# EAGLE board SolarPoints (EAGLE 9.6.2)

Size 160 x 100 mm. Coordinates in mm from the lower left corner, seen from the top.
Outline: 0,0 160,0 160,100 0,100 0,0
Copper layers (1*16): Top 0.035mm / dielectric 1.5mm / Bottom 0.035mm
Design rules "default": minimum track width 6mil, minimum drill 0.35mm, track to track 6mil, track to pad 6mil, pad to pad 6mil, via to via 6mil, smd to smd 6mil, copper to edge 40mil, drill to drill 6mil, minimum pad ring 10mil, minimum via ring 8mil, stop-mask expansion 4mil, vias tented up to drill 0mil, thermal gap 10mil

## Footprints (pad centres in the part's own frame; a part is rotated, then mirrored left to right if it is on the bottom)
BATTERY-GENERIC = drill 1.118 pad 3.15 octagon: + 2.54,0; - -2.54,0
DO-41 = drill 1: A 4.325,0 | drill 1 square: C -4.325,0
LDH-5R = drill 0.813 long: 1 -1.27,-5.08; 2 1.27,-5.08 | hole 1.219: 2.54,0; -2.54,0
91A1A-B28-B15L-ND = drill 1: 1 2.54,0; 2 0,0; 3 -2.54,0
TO92-EBC = drill 0.813 long: B 0,-1.27; C -2.54,-1.27; E 2.54,-1.27
RESAD1016W63L850D250B = drill 0.83 pad 1.43: 1 -5.08,0; 2 5.08,0
REL-5PIN = drill 1.016 long: C 8.89,3.81; O 13.945,-3.81; S 3.734,-3.81; S1 -11.43,-3.81; S2 -11.43,3.835
HC-SR501 = drill 1.016 pad 1.88 octagon: GND 2.54,10.795; OUT 0,10.795 | drill 1.016 pad 1.88 square: VCC -2.54,10.795
TO254P1054X470X1955-3 = drill 1.24 pad 1.86 square: 1 -2.54,-0.51 | drill 1.24 pad 1.86: 2 0,-0.51; 3 2.54,-0.51
DO34Z7 = drill 0.813 long: A 3.81,0; C -3.81,0

## Placement (x,y rotation side)
BATTERY  12V  [BATTERY-GENERIC]  102.87,38.1 0 top
D1  1N4004  [DO-41]  24.13,53.34 180 top
D2  1N4004  [DO-41]  68.58,50.8 180 top
D4  1N4004  [DO-41]  102.87,50.8 0 top
LMP1  [LDH-5R]  124.46,80.01 0 top
POTENCIOMETRO  2k  [91A1A-B28-B15L-ND]  46.99,25.4 270 top
Q1  BC548  [TO92-EBC]  57.15,29.21 270 bottom
R1  180  [RESAD1016W63L850D250B]  58.42,45.72 90 top
R2  7  [RESAD1016W63L850D250B]  83.82,50.8 0 top
R3  1K  [RESAD1016W63L850D250B]  76.2,29.21 0 top
R4  220  [RESAD1016W63L850D250B]  125.73,62.23 270 top
REL1  [REL-5PIN]  102.87,71.12 90 top
SENSOR_PIR  HC-SR501  [HC-SR501]  67.31,73.66 270 top
VR1  LM317T  [TO254P1054X470X1955-3]  46.99,50.8 90 bottom
ZENER  14  [DO34Z7]  88.9,33.02 270 top

## Library data of the parts
BATTERY R1-R4 = Tinkercad
D1 D2 D4 = Diodes; CREATED_BY: PCBLayout.com; DIGIKEY_PART_NUMBER: 1N4004MSCT-ND; MANUFACTURER: Micro Commercial Co; MPN: 1N4004; PACKAGE: DO-41
LMP1 REL1 = special
POTENCIOMETRO = Potentiometer_Trimmers; CREATED_BY: PCBLayout.com; DIGIKEY_PARTNO: 91A1A-B28-B15L-ND; MANUFACTURER: Bourns Inc.; MPN: 91A1A-B28-B15L
Q1 = transistor-npn
SENSOR_PIR = Sensors_PIR_Lux
VR1 = LM317T; AVAILABILITY: In Stock; CHECK_PRICES: https://www.snapeda.com/parts/LM317T/Texas+Instruments/view-part/?ref=eda; DESCRIPTION: 1.5-A, 40-V, adjustable linear voltage regulator 3-TO-220; MF: Texas Instruments; MP: LM317T; PACKAGE: TO-220-3 Texas Instruments; PRICE: None; SNAPEDA_LINK: https://www.snapeda.com/parts/LM317T/Texas+Instruments/view-part/?ref=snap
ZENER = diode; SPICEPREFIX: B

## Nets
GND: BATTERY.- D4.A LMP1.1 POTENCIOMETRO.1 Q1.E REL1.C REL1.S REL1.S1 SENSOR_PIR.GND
N$1: BATTERY.+ D4.C R2.2 REL1.S2 ZENER.C
N$2: R3.2 ZENER.A
N$3: Q1.B R3.1
N$4: POTENCIOMETRO.2 POTENCIOMETRO.3 Q1.C R1.1 VR1.1
N$5: D2.A R1.2 VR1.2
N$6: D2.C R2.1
N$7: LMP1.2 R4.1
N$8: D1.A
N$9: D1.C VR1.3
N$10: R4.2 SENSOR_PIR.OUT
N$12: REL1.O SENSOR_PIR.VCC

## Tracks (layer width: path | path; a pad name or v marks a point on that pad's centre or on a via)
GND  (8 unrouted)
N$1  (4 unrouted)
N$2  (1 unrouted)
N$3  (1 unrouted)
N$4  (4 unrouted)
N$5  (2 unrouted)
N$6  (1 unrouted)
N$7  (1 unrouted)
N$9  (1 unrouted)
N$10  (1 unrouted)
N$12  (1 unrouted)